# Altium PCB PCB.PcbDoc (part 1 of 2)
Units mil, origin at the board's own origin, x right, y up, seen from the top; angles counter-clockwise.
Board outline 2345 x 4805 mil, 4 copper layers (Top Layer, GND, POWER, Bottom Layer), stack 30.634 mil thick; 165 components, 153 nets, 527 pads, 283 vias.
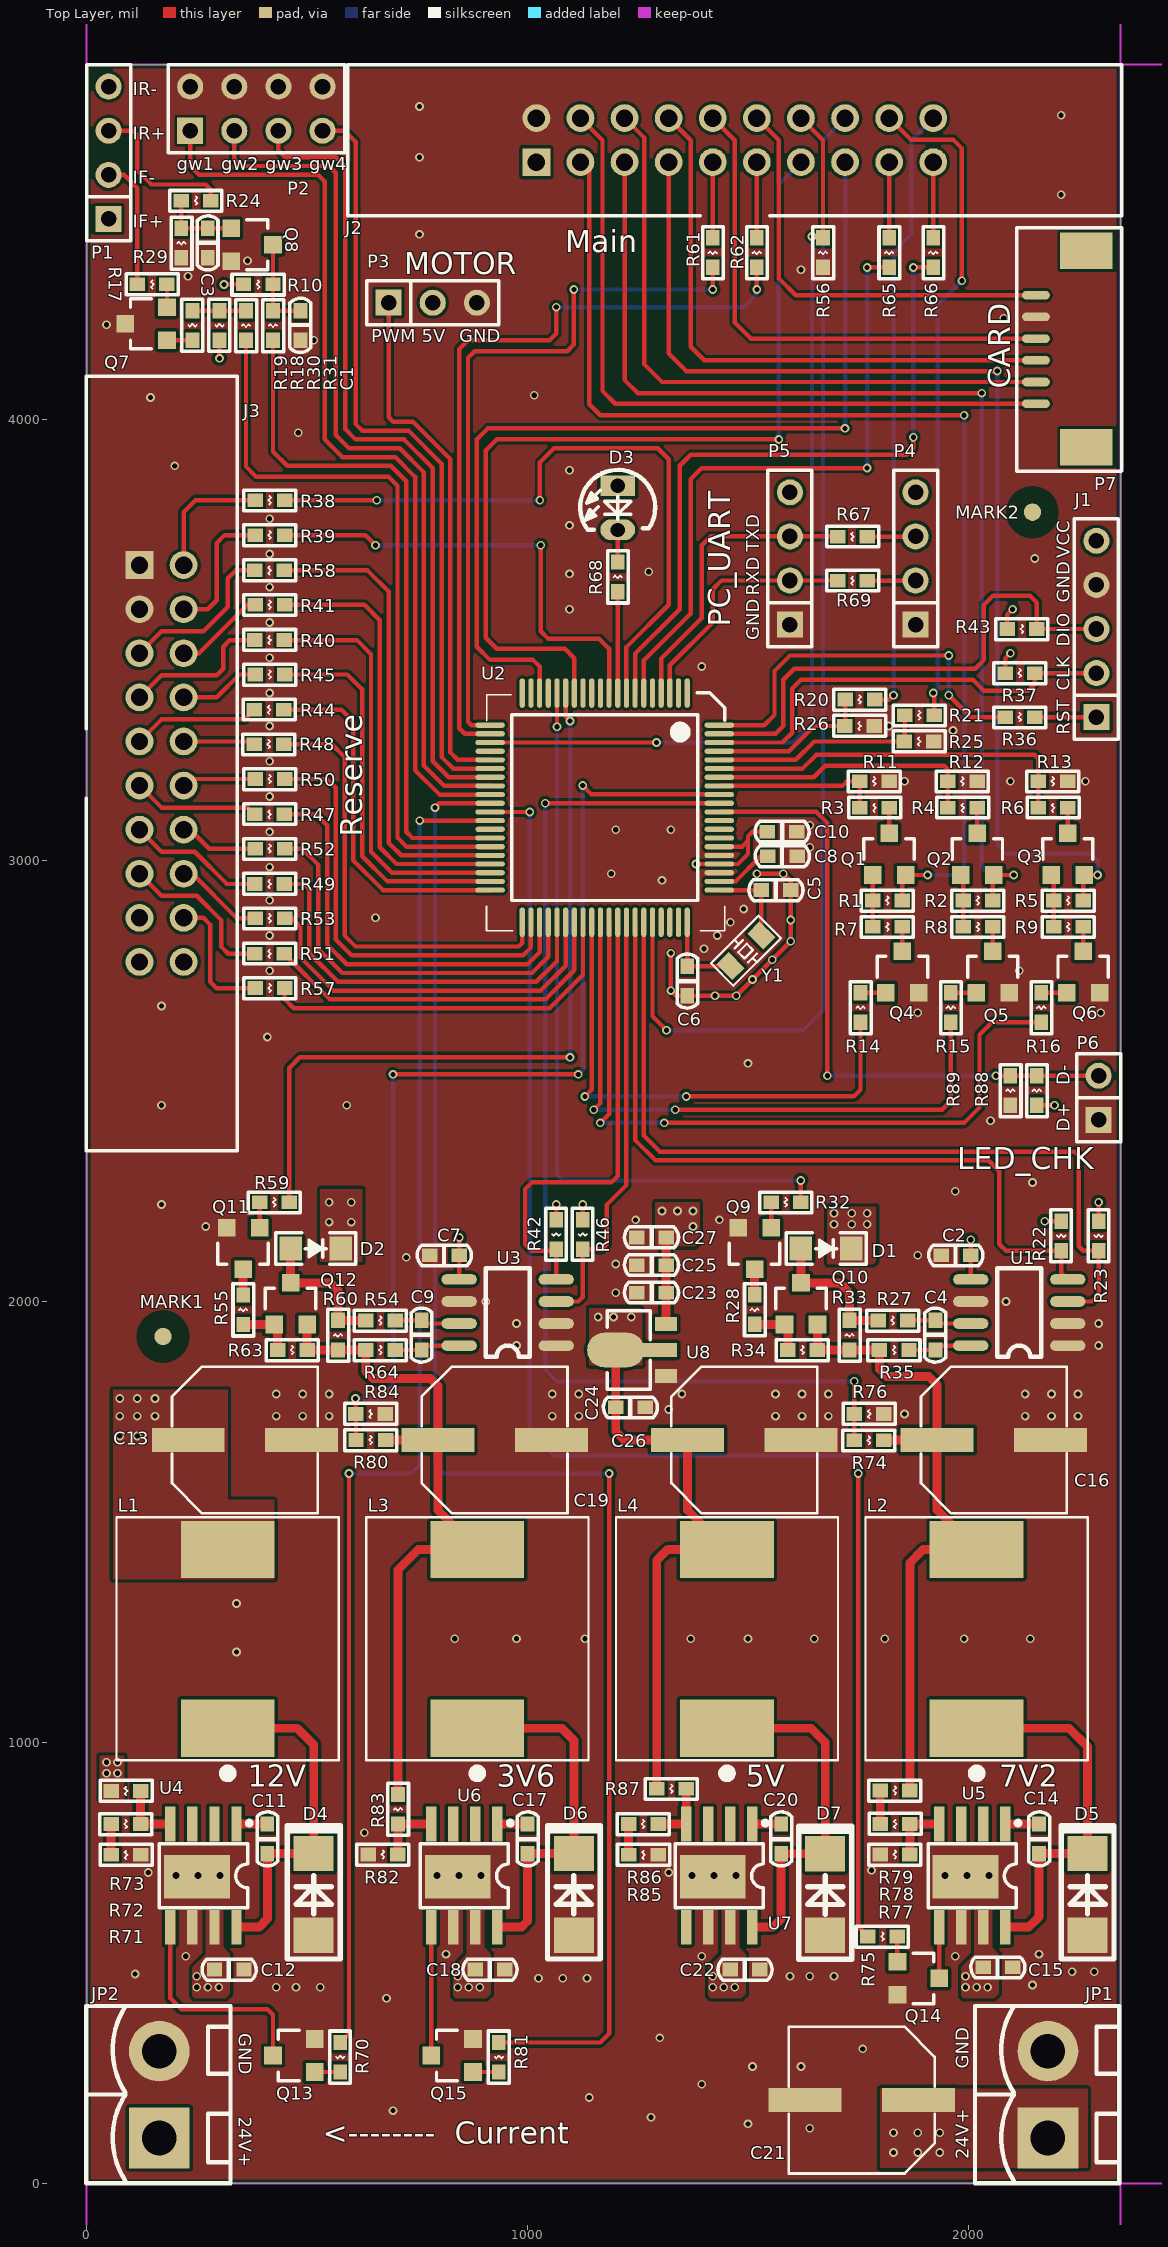
[diagram p0: Top Layer view]
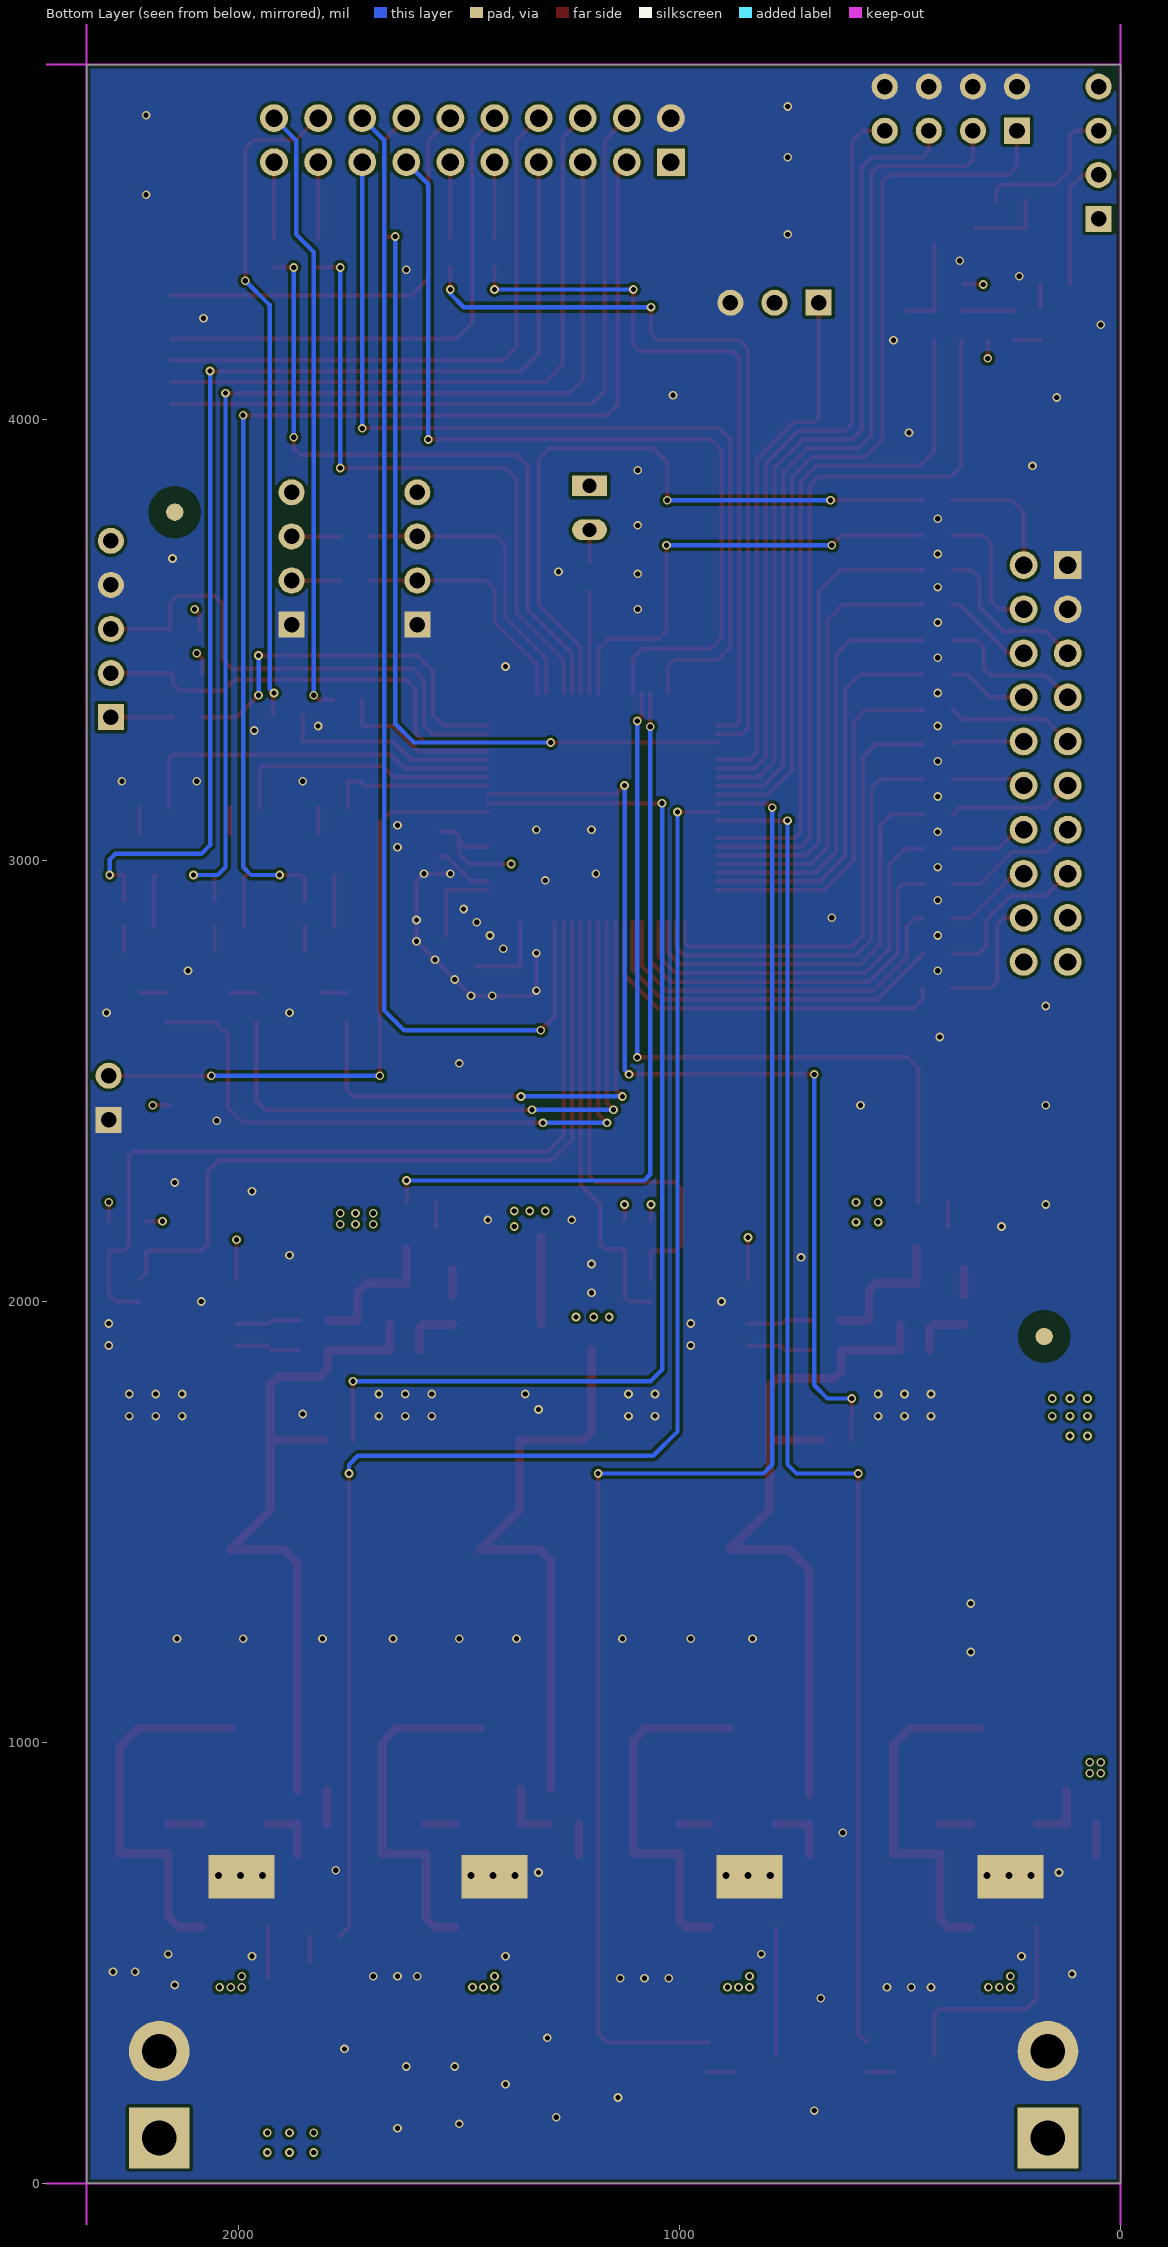
[diagram p1: Bottom Layer view, seen from below]
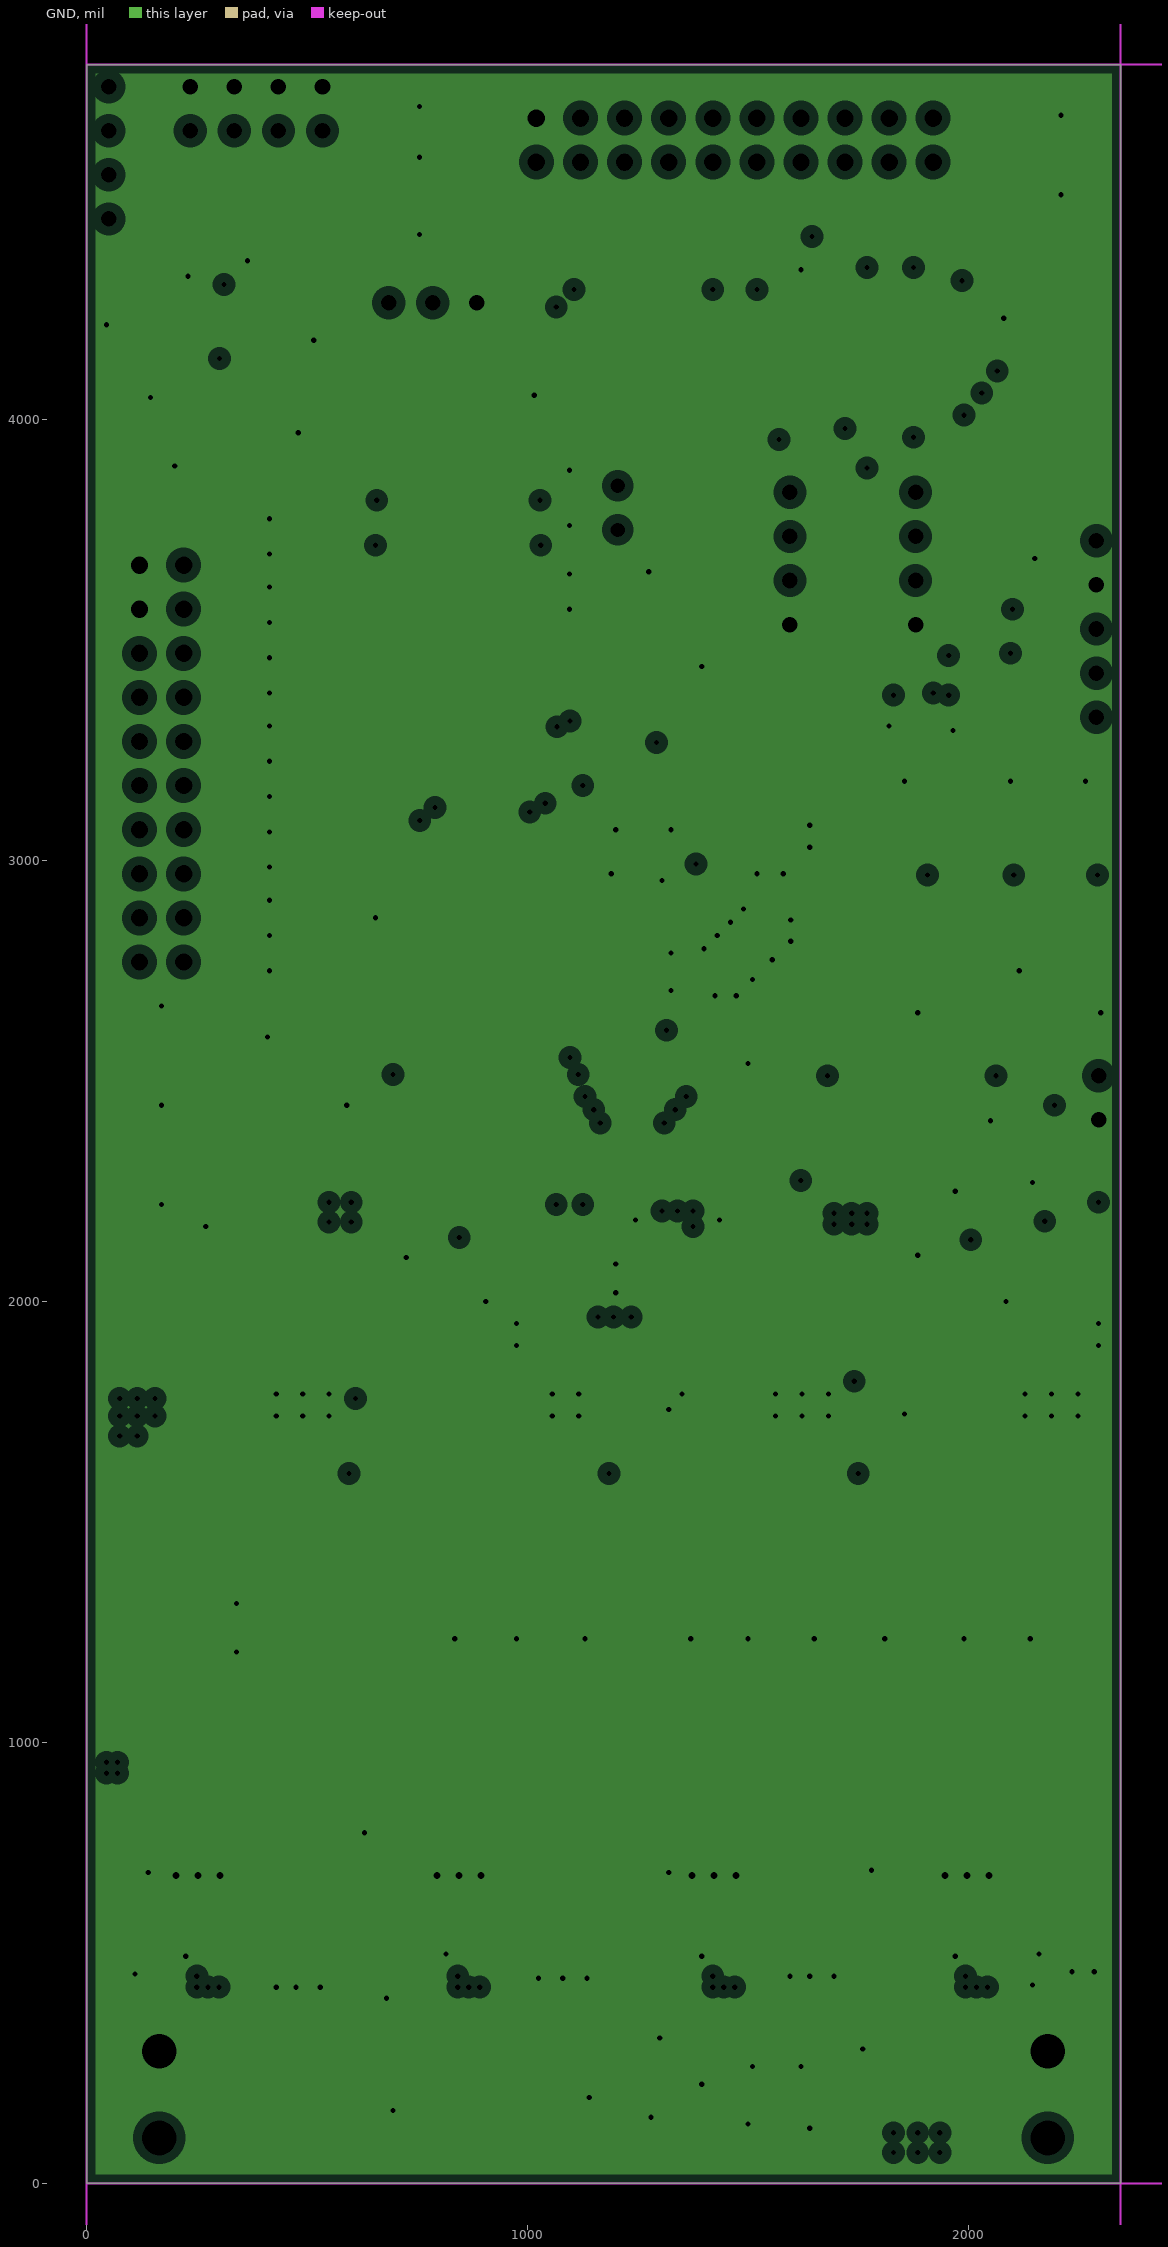
[diagram p2: GND, clearances drawn from the general rule]
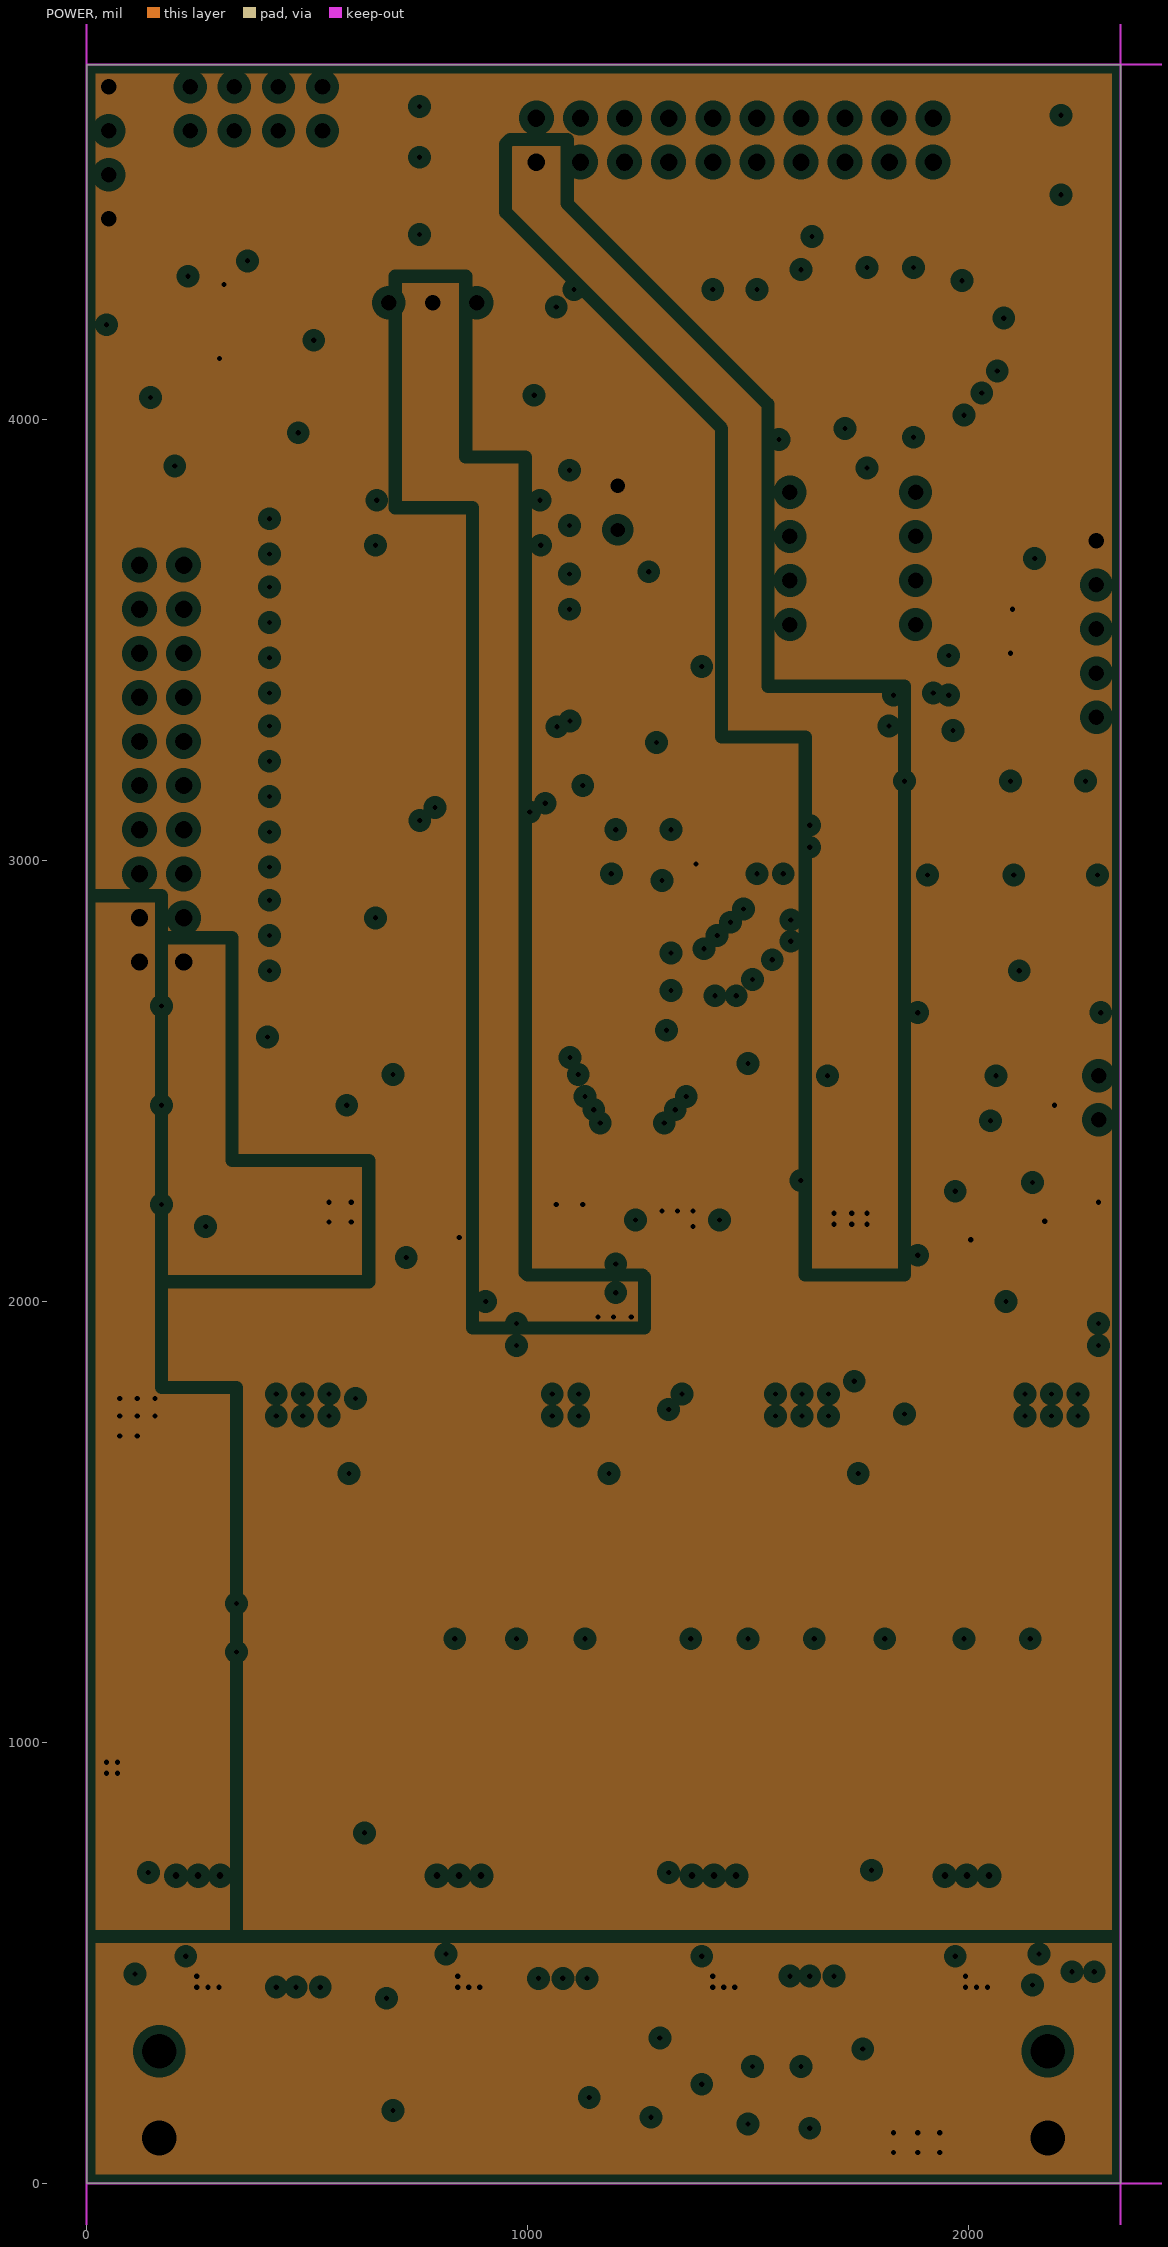
[diagram p3: POWER, clearances drawn from the general rule]

## Layer stack, top to bottom
Top Solder: solder mask 0.4, Solder Resist, Dk 3.5
Top Layer: signal copper 1.4
Dielectric 1: core 10, FR-4, Dk 4.2
GND: plane copper 1.417, net GND
Dielectric 3: prepreg 5, Dk 4.2
POWER: plane copper 1.417, net 3.3V
Dielectric 2: core 10, Dk 4.2
Bottom Layer: signal copper 1.4
Bottom Solder: solder mask 0.4, Solder Resist, Dk 3.5

## Board outline
0,0 2345,0 2345,4805 0,4805

## Design rules (kind name [scope] priority, off if disabled: settings)
Clearance [All] p1: gap=7 ignorepadtopadclearanceinfootprint=FALSE except(0: Arc-Hole Track-Hole SMDPad-Hole THPad-Hole Via-Hole Fill-Hole Poly-Hole Region-Hole Text-Hole)
MinimumSolderMaskSliver [All] p1: minsoldermaskwidth=0
PlaneClearance [All] p1: clearance=20
PlaneConnect [All] p1: planeconnectstyle=Direct reliefexpansion=20 reliefentries=4 reliefconductorwidth=10 reliefairgap=10
PolygonConnect [All] p1: connectstyle=Direct reliefconductorwidth=10 reliefentries=4 polygonreliefangle="90 Angle" airgapwidth=10
RoutingVias [All] p1: holewidth=28 width=50 viastyle="Through Hole" minholewidth=28 minwidth=50 maxholewidth=28 maxwidth=50
SilkToSilkClearance [All] p1: silktosilkclearance=0
SilkToSolderMaskClearance [IsPad] p1: minsilkscreentomaskgap=0 clearancetoexposedcopper=TRUE
SolderMaskExpansion [All] p1: expansion=4
Width [All] p1: maxlimit=30 minlimit=10 preferedwidth=10
25 further rules are at their usual default settings.

## Classes and differential pairs
component class 主控: C1 C2 C3 C4 C5 C6 C7 C8 C9 C10 D1 D2 D3 J1 J2 J3 MARK1 MARK2 P1 P2 P3 P4 P5 P6 P7 Q1 Q2 Q3 Q4 Q5 Q6 Q7 Q8 Q9 Q10 Q11 Q12 R1 R2 R3 R4 R5 R6 R7 R8 R9 R10 R11 R12 R13 R14 R15 R16 R17 R18 R19 R20 R21 R22 R23 R24 R25 R26 R27 R28 R29 R30 R31 R32 R33 R34 R35 R36 R37 R38 R39 R40 R41 R42 R43 R44 R45 R46 R47 R48 R49 R50 R51 R52 R53 R54 R55 R56 R57 R58 R59 R60 R61 R62 R63 R64 R65 R66 R67 R68 R69 R88 R89 U1 U2 U3 Y1
component class 电源: C11 C12 C13 C14 C15 C16 C17 C18 C19 C20 C21 C22 C23 C24 C25 C26 C27 D4 D5 D6 D7 JP1 JP2 L1 L2 L3 L4 Q13 Q14 Q15 R70 R71 R72 R73 R74 R75 R76 R77 R78 R79 R80 R81 R82 R83 R84 R85 R86 R87 U4 U5 U6 U7 U8

## Components (designator, comment, footprint, x,y, rotation, side; value= is the part's Value field where it differs from the comment)
C1 "100pF/50V" CAP0603 485,4246.51 r270 top
C2 "100nF/50V" CAP0603 1938.49,2105 r0 top
C3 "10pF/50V" CAP0603 275,4433.42 r270 top
C4 "100nF/50V" CAP0603 1925,1956.51 r270 top
C5 "12pF/50V" CAP0603 1530.49,2932.99 r0 top
C6 "12pF/50V" CAP0603 1362.01,2693.89 r90 top
C7 "100nF/50V" CAP0603 778.49,2105 r0 top
C8 "100nF/50V" CAP0603 1545,3010 r0 top
C9 "100nF/50V" CAP0603 760,1956.51 r270 top
C10 "100nF/50V" CAP0603 1610,3065 r180 top
C11 "10N/50V" CAP0603 410,748.49 r90 top
C12 "100N/50V" CAP0603 290.49,485 r0 top
C13 "220uF/25V" "220uF 25V" 367.16,1685 r0 top
C14 "10nF/50V" CAP0603 2160,748.49 r90 top
C15 "100nF/50V" CAP0603 2033.82,490 r0 top
C16 "220uF/25V" "220uF 25V" 2065.49,1685 r0 top
C17 "10N/50V" CAP0603 1000,748.49 r90 top
C18 "100N/50V" CAP0603 882.16,485 r0 top
C19 "220uF/25V" "220uF 25V" 933.27,1685 r0 top
C20 "10N/50V" CAP0603 1575,748.49 r90 top
C21 "220uF/25V" "220uF 25V" 1750,190 r180 top
C22 "100N/50V" CAP0603 1460.49,485 r0 top
C23 "10uF/10V" CAP0603 1313.68,2020 r180 top
C24 "100nF/50V" CAP0603 1200.49,1760 r0 top
C25 "100N/50V" CAP0603 1313.68,2082.5 r180 top
C26 "220uF/25V" "220uF 25V" 1499.38,1685 r0 top
C27 "22pF/50V" CAP0603 1313.68,2145 r180 top
D1 "DSK14" SOD-123FL 1617.09,2120 r0 top
D2 "DSK14" SOD-123FL 459.69,2120 r0 top
D3 "LED_T3R" LED2_300 1204.53,3850 r0 top
D4 "B340A-SMA" DO-214AC 515,655.5 r90 top
D5 "B340" DO-214AC 2270,655.5 r90 top
D6 "B340A-SMA" DO-214AC 1105,655.5 r90 top
D7 "B340A-SMA" DO-214AC 1675,655 r90 top
J1 "PIN254_1*5*WXHJ" PIN254_1*5*1100S 2290,3325 r90 top
J2 "20Pin" DC254_2*10 1470,4633.74 r90 top
J3 "20Pin" DC254_2*10 170,3220 r0 top
JP1 "KF129_508_2" KF129_508_2 2180,103.15 r90 top
JP2 "KF129_508_2" KF129_508_2 165,103.15 r90 top
L1 "LQS1260M2200_47uH" LQS1212 320,1235 r90 top
L2 "LQS1260M2200_47uH" LQS1212 2018.33,1235 r90 top
L3 "LQS1260M2200_47uH" LQS1212 886.11,1235 r90 top
L4 "LQS1260M2200_47uH" LQS1212 1452.22,1235 r90 top
MARK1 "MARK" MARK 173.35,1920.62 r90 top
MARK2 "MARK" MARK 2145,3790 r90 top
P1 "PIN254_1*4*WXHJ" PIN254_1*4*1100S 50,4455 r90 top
P2 "Header 4X2" HDR2X4 235,4655 r0 top
P3 "PIN254_1*3*WXHJ" PIN254_1*3*1100S 685,4265 r0 top
P4 "PIN254_1*4*WXHJ" PIN254_1*4*1100S 1880,3535 r90 top
P5 "PIN254_1*4*WXHJ" PIN254_1*4*1100S 1595,3535 r90 top
P6 "PIN254_1*2*WXHJ" PIN254_1*2*1100S 2295,2412 r90 top
P7 "1.25-6AWR" SMT-1.25-6 2210,4160 r90 top
Q1 "PNPS-9012" SOT-23 1820,3014.49 r0 top
Q2 "PNPS-9012" SOT-23 2020,3014.49 r0 top
Q3 "PNPS-9012" SOT-23 2225,3014.49 r0 top
Q4 "NPNS-9013" SOT-23 1850,2747.24 r0 top
Q5 "NPNS-9013" SOT-23 2055,2747.24 r0 top
Q6 "NPNS-9013" SOT-23 2260,2747.24 r0 top
Q7 "PNPS-9012" SOT-23 135,4217.4 r90 top
Q8 "NPNS-9013" SOT-23 375.51,4396.51 r270 top
Q9 "NPNS-9013" SOT-23 1515,2120 r180 top
Q10 "RZR040P01TL" SOT-23 1620,1995 r0 top
Q11 "NPNS-9013" SOT-23 355,2120 r180 top
Q12 "RZR040P01TL" SOT-23 462.6,1995 r0 top
Q13 "NPNS-9013" SOT-23 470,290 r90 top
Q14 "NPNS-9013" SOT-23 1886.09,465 r270 top
Q15 "NPNS-9013" SOT-23 828.91,290 r90 top
R1 "100K 5%" RES0603 1783,2909.49 r0 top
R2 "100K 5%" RES0603 1988,2909.49 r0 top
R3 "100K 5%" RES0603 1820,3119.49 r180 top
R4 "100K 5%" RES0603 2020,3119.49 r180 top
R5 "100K 5%" RES0603 2193,2909.49 r0 top
R6 "100K 5%" RES0603 2225,3119.49 r180 top
R7 "10K 1%" RES0603 1783,2849.49 r0 top
R8 "10K 1%" RES0603 1988,2849.49 r0 top
R9 "10K 1%" RES0603 2193,2849.49 r0 top
R10 "20K 5%" RES0603 355.75,4306.51 r0 top
R11 "10K 5%" RES0603 1753,3179.49 r0 top
R12 "10K 5%" RES0603 1953,3179.49 r0 top
R13 "10K 5%" RES0603 2158,3179.49 r0 top
R14 "1K 5%" RES0603 1755,2633 r90 top
R15 "1K 5%" RES0603 1960,2633 r90 top
R16 "1K 5%" RES0603 2165,2633 r90 top
R17 "100R 5%" RES0603 182.24,4306.51 r180 top
R18 "20K 5%" RES0603 301.25,4247 r270 top
R19 "3K 5%" RES0603 240,4247 r270 top
R20 "100K 5%" RES0603 1720,3365 r0 top
R21 "100K 5%" RES0603 1855,3329.33 r0 top
R22 "10K 5%" RES0603 2210,2182 r270 top
R23 "10K 5%" RES0603 2295,2182 r270 top
R24 "20K 5%" RES0603 215,4496.51 r0 top
R25 "10K 5%" RES0603 1921,3270 r180 top
R26 "10K 5%" RES0603 1786,3305 r180 top
R27 "10R 5%" RES0603 1795,1957 r0 top
R28 "200K 5%" RES0603 1515,1948 r90 top
R29 "47K 5%" RES0603 215,4366.91 r90 top
R30 "0R 5%" RES0603 361.5,4180 r90 top
R31 "0R 5%" RES0603 422.75,4180 r90 top
R32 "1K 5%" RES0603 1552.4,2225 r0 top
R33 "10R 5%" RES0603 1730,1890 r90 top
R34 "2M 5%" RES0603 1590.4,1890 r0 top
R35 "10R 5%" RES0603 1798,1890 r0 top
R36 "100R 5%" RES0603 2083,3325 r0 top
R37 "10K 5%" RES0603 2083,3425 r0 top
R38 "0R 5%" RES0603 382,3817 r0 top
R39 "0R 5%" RES0603 382,3737.98 r0 top
R40 "0R 5%" RES0603 448,3499.93 r180 top
R41 "0R 5%" RES0603 382,3579.94 r0 top
R42 "10K 5%" RES0603 1065,2185 r270 top
R43 "10K 5%" RES0603 2088,3525 r0 top
R44 "0R 5%" RES0603 447,3341.89 r180 top
R45 "0R 5%" RES0603 382,3421.91 r0 top
R46 "10K 5%" RES0603 1125,2185 r270 top
R47 "0R 5%" RES0603 448,3104.84 r180 top
R48 "0R 5%" RES0603 380,3263.87 r0 top
R49 "0R 5%" RES0603 448,2946.8 r180 top
R50 "0R 5%" RES0603 382,3184.85 r0 top
R51 "0R 5%" RES0603 448,2788.76 r180 top
R52 "0R 5%" RES0603 382,3026.82 r0 top
R53 "0R 5%" RES0603 382,2868.78 r0 top
R54 "10R 5%" RES0603 633,1957 r0 top
R55 "200K 5%" RES0603 355,1947.76 r90 top
R56 "10K 5%" RES0603 1670,4345 r90 top
R57 "0R 5%" RES0603 382,2710.75 r0 top
R58 "0R 5%" RES0603 448,3657.96 r180 top
R59 "1K 5%" RES0603 392.4,2225 r0 top
R60 "10R 5%" RES0603 570,1890 r90 top
R61 "0R 5%" RES0603 1420,4345 r90 top
R62 "0R 5%" RES0603 1520,4345 r90 top
R63 "2M 5%" RES0603 433,1890 r0 top
R64 "10R 5%" RES0603 633,1890 r0 top
R65 "0R 5%" RES0603 1820,4345 r90 top
R66 "0R 5%" RES0603 1920,4345 r90 top
R67 "22R 5%" RES0603 1770,3734.5 r180 top
R68 "1K 5%" RES0603 1204.53,3610 r90 top
R69 "22R 5%" RES0603 1770,3634.5 r180 top
R70 "1K 5%" RES0603 575,319.6 r270 top
R71 "1K 5%" RES0603 122.49,745 r180 top
R72 "10K 5%" RES0603 55.49,815 r0 top
R73 "100K 5%" RES0603 122.49,890 r180 top
R74 "100K 5%" RES0603 1741,1685 r0 top
R75 "1K 5%" RES0603 1771.84,560 r0 top
R76 "10K 5%" RES0603 1808,1745 r180 top
R77 "5.1K 5%" RES0603 1800,746 r0 top
R78 "25K 1%" RES0603 1867,815 r180 top
R79 "1.5K 5%" RES0603 1800,891 r0 top
R80 "100K 5%" RES0603 611,1686 r0 top
R81 "1K 5%" RES0603 935,319.6 r270 top
R82 "4.7K 5%" RES0603 639,746 r0 top
R83 "10K 5%" RES0603 706,815 r90 top
R84 "10K 5%" RES0603 677,1745 r180 top
R85 "20K 5%" RES0603 1296,745 r180 top
R86 "10K 5%" RES0603 1229,815 r0 top
R87 "100K 5%" RES0603 1293,895 r0 top
R88 "100K 5%" RES0603 2155,2445 r90 top
R89 "10K 5%" RES0603 2095,2445 r90 top
U1 "INA219" SO-8 2225,1900 r180 top
U2 "FM33LG048" LQFP80 1175,3120 r270 top
U3 "INA219" SO-8 1065,1900 r180 top
U4 "TPS5430DDA" SOP-8-P 340,815 r270 top
U5 "TPS5430DDA" SOP-8-P 2083.33,815 r270 top
U6 "TPS5430DDA" SOP-8-P 931.67,815 r270 top
U7 "TPS5430DDA" SOP-8-P 1510,815 r270 top
U8 "CE6232A33P" SOT-89 1278.74,1890 r90 top
Y1 "32.768kD" SMD-3215_2P 1530,2830 r225 top

## Footprints (in the part's own frame and the unit in brackets; to place one, negate y for a bottom-side part, rotate by r counter-clockwise, add the part's x,y. Pads: shape width x height; smd on the part's side, far side on the other; paste and mask are expansions set on the pad)
"220uF 25V" [mm]
  rect 4.2x1.4 smd: 1(-3.47,0.025) 2(3.064,0.025)
  silkscreen extent -4.4,-4.2 4,4.25
CAP0603 [mil]
  rect 35x31 smd: 1(-0.49,0) 2(66.51,0)
  silkscreen extent -29,-24 94,23, body extent 1,-15 72,15, height 20
DC254_2*10 [mm]
  rect 1.6x1.6 hole 1: 1(-1.27,11.43)
  round 1.6 hole 1: 2(1.27,11.43) 3(-1.27,8.89) 4(1.27,8.89) 5(-1.27,6.35) 6(1.27,6.35) 7(-1.27,3.81) 8(1.27,3.81) 9(-1.27,1.27) 10(1.27,1.27) 11(-1.27,-1.27) 12(1.27,-1.27) 13(-1.27,-3.81) 14(1.27,-3.81) 15(-1.27,-6.35) 16(1.27,-6.35) 17(-1.27,-8.89) 18(1.27,-8.89) 19(-1.27,-11.43) 20(1.27,-11.43)
  silkscreen extent -4.35,-22.3 4.35,22.3
DO-214AC [mil]
  rect 80x90.55 smd: 1(-92.5,0) 2(92.5,0)
  silkscreen extent -146,-60 156,60, body extent -91,-53 90,53, height 94
HDR2X4 [mm] "Connector; Header; 4x2 Position"
  rect 1.5x1.5 hole 0.9: 1(0,0)
  round 1.5 hole 0.9: 2(0,2.54) 3(2.54,0) 4(2.54,2.54) 5(5.08,0) 6(5.08,2.54) 7(7.62,0) 8(7.62,2.54)
  silkscreen extent -1.27,-1.27 8.89,3.81
KF129_508_2 [mm]
  rect 3.5x3.5 hole 2: 1(0,0)
  round 3.5 hole 2: 2(5,0)
  silkscreen extent -2.6,-4.1 7.6,4.2
LED2_300 [mm]
  rect 2x1.2 hole 0.813: 1(0,0)
  oval 2x1.2 hole 0.813: 2(0,-2.54)
  silkscreen extent -2.16,-2.53 2.16,0.91, body extent -1.65,-2.91 1.64,0.39, height 5.51
LQFP80 [mm]
  oval 1.7x0.3 smd: 1(-6.6,4.75) 2(-6.6,4.25) 3(-6.6,3.75) 4(-6.6,3.25) 5(-6.6,2.75) 6(-6.6,2.25) 7(-6.6,1.75) 8(-6.6,1.25) 9(-6.6,0.75) 10(-6.6,0.25) 11(-6.6,-0.25) 12(-6.6,-0.75) 13(-6.6,-1.25) 14(-6.6,-1.75) 15(-6.6,-2.25) 16(-6.6,-2.75) 17(-6.6,-3.25) 18(-6.6,-3.75) 19(-6.6,-4.25) 20(-6.6,-4.75) 41(6.6,-4.75) 42(6.6,-4.25) 43(6.6,-3.75) 44(6.6,-3.25) 45(6.6,-2.75) 46(6.6,-2.25) 47(6.6,-1.75) 48(6.6,-1.25) 49(6.6,-0.75) 50(6.6,-0.25) 51(6.6,0.25) 52(6.6,0.75) 53(6.6,1.25) 54(6.6,1.75) 55(6.6,2.25) 56(6.6,2.75) 57(6.6,3.25) 58(6.6,3.75) 59(6.6,4.25) 60(6.6,4.75)
  oval 0.3x1.7 smd: 21(-4.75,-6.6) 22(-4.25,-6.6) 23(-3.75,-6.6) 24(-3.25,-6.6) 25(-2.75,-6.6) 26(-2.25,-6.6) 27(-1.75,-6.6) 28(-1.25,-6.6) 29(-0.75,-6.6) 30(-0.25,-6.6) 31(0.25,-6.6) 32(0.75,-6.6) 33(1.25,-6.6) 34(1.75,-6.6) 35(2.25,-6.6) 36(2.75,-6.6) 37(3.25,-6.6) 38(3.75,-6.6) 39(4.25,-6.6) 40(4.75,-6.6) 61(4.75,6.6) 62(4.25,6.6) 63(3.75,6.6) 64(3.25,6.6) 65(2.75,6.6) 66(2.25,6.6) 67(1.75,6.6) 68(1.25,6.6) 69(0.75,6.6) 70(0.25,6.6) 71(-0.25,6.6) 72(-0.75,6.6) 73(-1.25,6.6) 74(-1.75,6.6) 75(-2.25,6.6) 76(-2.75,6.6) 77(-3.25,6.6) 78(-3.75,6.6) 79(-4.25,6.6) 80(-4.75,6.6)
  silkscreen extent -6.62,-6.81 7.1,6.91, body extent -5.33,-5.33 5.36,5.33, height 2
LQS1212 [mm]
  rect 3.3x5.4 smd: 1(-5.15,0) 2(5.15,0)
  silkscreen extent -8,-6.4 7,6.4, body extent -6.35,-6.1 6.35,6.1, height 6
MARK [mm]
  round 1 smd: 0(0,0)
  round 1 smd far side: 1(0,0)
  Top Layer pour cut-out: -1.5,0 -1.5,-0.148 -1.442,-0.438 -1.329,-0.711 -1.165,-0.956 -0.956,-1.165 -0.711,-1.329 -0.438,-1.442 -0.148,-1.5 0,-1.5 0.148,-1.5 0.438,-1.442 0.711,-1.329 0.956,-1.165 1.165,-0.956 1.329,-0.711 1.442,-0.438 1.5,-0.148 1.5,0 1.5,0.148 1.442,0.438 1.329,0.711 1.165,0.956 0.956,1.165 0.711,1.329 0.438,1.442 0.148,1.5 0,1.5 -0.148,1.5 -0.438,1.442 -0.711,1.329 -0.956,1.165 -1.165,0.956 -1.329,0.711 -1.442,0.438 -1.5,0.148 -1.5,0
  Bottom Layer pour cut-out: -1.5,0 -1.5,-0.148 -1.442,-0.438 -1.329,-0.711 -1.165,-0.956 -0.956,-1.165 -0.711,-1.329 -0.438,-1.442 -0.148,-1.5 0,-1.5 0.148,-1.5 0.438,-1.442 0.711,-1.329 0.956,-1.165 1.165,-0.956 1.329,-0.711 1.442,-0.438 1.5,-0.148 1.5,0 1.5,0.148 1.442,0.438 1.329,0.711 1.165,0.956 0.956,1.165 0.711,1.329 0.438,1.442 0.148,1.5 0,1.5 -0.148,1.5 -0.438,1.442 -0.711,1.329 -0.956,1.165 -1.165,0.956 -1.329,0.711 -1.442,0.438 -1.5,0.148 -1.5,0
PIN254_1*2*1100S [mm] "Connector; Header; 4 Position"
  rect 1.5x1.5 hole 0.9: 1(0,0)
  round 1.5 hole 0.9: 2(2.54,0)
  silkscreen extent -1.27,-1.27 3.81,1.27
PIN254_1*3*1100S [mm] "Connector; Header; 4 Position"
  rect 1.5x1.5 hole 0.9: 1(0,0)
  round 1.5 hole 0.9: 2(2.54,0) 3(5.08,0)
  silkscreen extent -1.27,-1.27 6.35,1.27
PIN254_1*4*1100S [mm] "Connector; Header; 4 Position"
  rect 1.5x1.5 hole 0.9: 1(0,0)
  round 1.5 hole 0.9: 2(2.54,0) 3(5.08,0) 4(7.62,0)
  silkscreen extent -1.27,-1.27 8.89,1.27, body extent -1.3,-1.3 8.86,1.24, height 8.54
PIN254_1*5*1100S [mm]
  rect 1.5x1.5 hole 0.9: 1(0,0)
  round 1.5 hole 0.9: 2(2.54,0) 3(5.08,0) 4(7.62,0) 5(10.16,0)
  silkscreen extent -1.27,-1.27 11.43,1.27
RES0603 [mil]
  rect 35x31 smd: 1(0,0) 2(67,0)
  silkscreen extent -26,-24 92,23, body extent 0,-15 71,15, height 12
SMD-3215_2P [mm]
  rect 1x1.3 smd: 1(0,0) 2(2.5,0)
  silkscreen extent -0.69,-0.91 3.19,0.91, body extent -0.3,-0.99 2.9,0.99, height 0.7
SMT-1.25-6 [mm]
  oval 0.5x1.6 smd: 1(-3.15,1.45) 2(-1.9,1.45) 3(-0.65,1.45) 4(0.6,1.45) 5(1.85,1.45) 6(3.1,1.45)
  rect 2.1x3 smd: 7(-5.65,-1.45) 8(5.65,-1.45)
  silkscreen extent -7.05,-3.5 7,2.55
SO-8 [mil]
  oval 80x24 smd: 1(0,0) 2(0,-50) 3(0,-100) 4(0,-150) 5(220,-150) 6(220,-100) 7(220,-50) 8(220,0)
  silkscreen extent 60,-175 160,25, body extent -7,-171 229,21, height 67
SOD-123FL [mm]
  rect 1.3x1.4 smd: 1(0.074,0) 2(2.974,0)
  silkscreen extent -0.78,-0.9 3.82,0.9, body extent -0.28,-0.82 3.32,0.82, height 0.95
SOP-8-P [mm]
  rect 2x0.6 smd: 1(0,0) 2(0,-1.27) 3(0,-2.54) 4(0,-3.81) 5(5.94,-3.81) 6(5.94,-2.54) 7(5.94,-1.27) 8(5.94,0)
  rect 2.5x3.8 smd: 9(3.048,-2.286)
  rect 2.5x3.8 smd far side: 9(3.048,-2.286)
  silkscreen extent -0.18,-4.44 4.83,0.86, body extent 0.38,-4.57 5.72,0.76, height 1.8
SOT-23 [mil]
  rect 40x40 smd: 1(-37.4,-47.24) 2(37.4,-47.24) 3(0,47.24)
  silkscreen extent -57,-12 57,35, body extent -57,-55 57,55, height 47
SOT-89 [mm]
  rect 0.8x1.27 smd: 1(-1.5,-0.9) 3(1.5,-0.9)
  oval 2x3.3 smd: 2(0,2)
  rect 0.8x2.54 smd: 2(0,-0.265)
  silkscreen extent -2.25,0 2.25,2.5, body extent -2.25,-1.02 2.25,2.92, height 1.4

## Part data
C1: library part 101020103-0010, "101pf,50 V,±5%,0603,国巨,CC0603JRNP09BN101", Part Name=0603贴片电容, ID=4, Part Number=101020103-0010, SMD/DIP=SMD
C2 C4 C7 C8 C9 C10 C15 C24: library part 101020103-0021, "104pF,50 V,±10%,0603,国巨,CC0603KRX7R9BB104", Part Name=0603贴片电容, ID=3, Part Number=101020103-0021, SMD/DIP=SMD
C3: library part 101020103-0014, "10pF,50 V,±5%,0603,X7R,国巨,CC0603JRNPO9BN100", Part Name=0603贴片电容, ID=7, Part Number=101020103-0014, SMD/DIP=SMD
C5 C6: library part 101020103-0005, "12P,50 V,±5%,0603,国巨,CC0603JRNPO9BN12", Part Name=0603贴片电容, ID=11, Part Number=101020103-0005, SMD/DIP=SMD
C11 C17 C20: library part 101020103-0007, "10N/50V，±10%，0603", Part Name=0603贴片电容, ID=35, Part Number=101020103-0007
C12 C18 C22 C25: library part 101020103-0021, "100N/50V，±10%，0603", Part Name=0603贴片电容, ID=34, Part Number=101020103-0021
C13 C16 C19 C21 C26: "220UF,25 V,±20%,8*10mm,立隆电子工业股份有限公司,VEJ221M1ETR-0810", 料号=1010203-0037
C14: library part 101020103-0007, "10nF,50 V,±10%,0603,X7R,国巨,CC0603KRX7R9BB103", Part Name=0603贴片电容, ID=6, Part Number=101020103-0007, SMD/DIP=SMD
C23: library part 101020103-0026, "106pF,10 V,±10%,0603,村田,GRM188R61A106KE47D", Part Name=0603贴片电容, ID=8, Part Number=101020103-0026, SMD/DIP=SMD
C27: library part 101020103-0009, "22pF,50 V,±5%,0603,国巨,CC0603JRNPO9BN22", Part Name=0603贴片电容, ID=16, Part Number=101020103-0009, SMD/DIP=SMD
D1 D2: library part 101040101-0043, "DSK14,SOD-123FL,1 A,40 V,28 V,台湾强茂集团苏州群鑫电子,DSK14", Part Name=二极管, ID=10, Part Number=101040101-0043, SMD/DIP=SMD
D3: library part 101040102-0001, "圆形插件,3mm 圆形,插件,红光,湖北匡通电子有限公司,3BB4HC", Part Name=发光二极管, ID=6, Part Number=101040102-0001, SMD/DIP=DIP
D4 D6 D7: library part 101040101-0014, Part Name=贴片肖特基, ID=24, Part Number=101040101-0014
D5: library part 101040101-0014, "B340,SMA,3 A,0.7 V,28 V,DIODES,B340A-13-F", Part Name=贴片肖特基, ID=7, Part Number=101040101-0014, SMD/DIP=SMD
J1: library part AD_WXHJ_PinHeader_02, "1*5 ，Φ1.0 ，2.54mm，直脚,无需焊接器件", Part Name=排针, ID=17, Part Number=AD_WXHJ_PinHeader_02, SMD/DIP=DIP
J2 J3: library part 1010902-0139, "DC2 2.54mm 2x10pin,2.54mm间距，2x10pin，32×8.55×27.5mm,母头,双排,双排牛角座", Part Name=DC牛角座, ID=4, Part Number=1010902-0139, SMD/DIP=DIP
JP1 JP2: library part 1010904-0015, "KF129-2P,螺丝紧固,2,ABS,松涛", Part Name=接线端子, ID=7, Part Number=1010904-0015, SMD/DIP=DIP
L1 L2 L3 L4: library part 1010302-0007, "47uH/2.2A,±20%，0.072Ω，L1200X1200X600", Part Name=贴片电感, ID=3, Part Number=1010302-0007
MARK1 MARK2: "MARK点", Part Number=AD_WXHJ_MARK_01, ID=8, Part Name=MARK点, SMD/DIP=SMD
P1 P4 P5: library part AD_WXHJ_PinHeader_01, "1*4 ，Φ1.0 ，2.54mm，直脚,无需焊接器件", Part Name=排针, ID=16, Part Number=AD_WXHJ_PinHeader_01, SMD/DIP=DIP
P2: "Header, 4-Pin, Dual row"
P3: library part AD_WXHJ_PinHeader_01, "1*3 ，Φ1.0 ，2.54mm，直脚,无需焊接器件", Part Name=排针, ID=16, Part Number=AD_WXHJ_PinHeader_01, SMD/DIP=DIP
P6: library part AD_WXHJ_PinHeader_01, "1*2 ，Φ1.0 ，2.54mm，直脚,无需焊接器件", Part Name=排针, ID=16, Part Number=AD_WXHJ_PinHeader_01, SMD/DIP=DIP
P7: library part 1010902-0121, "1.25-6AWR 卷,6针1.25mm,母头,单排,贴片卧式", Part Name=插座, ID=32, Part Number=1010902-0121, SMD/DIP=SMD
Q1 Q2 Q3 Q7: library part 101040201-0001, "9012,PNP,SOT-23,JCET;长电,S9012", Part Name=贴片三极管, ID=17, Part Number=101040201-0001, SMD/DIP=SMD
Q4 Q5 Q6 Q8 Q9 Q11 Q13 Q14 Q15: library part 101040201-0002, "9013,NPN,SOT-23,长电,S9013", Part Name=贴片三极管, ID=15, Part Number=101040201-0002, SMD/DIP=SMD
Q10 Q12: library part 101040201-0010, "RZR040P01TL；1.5v导通,P-MOS,SOT-23,罗姆,RZR040P01TL", Part Name=PMOS管, ID=18, Part Number=101040201-0010, SMD/DIP=SMD
R1 R2 R3 R4 R5 R6 R73 R74 R88: library part 101010103-0005, "国巨,±5%,0603,,155 ℃,-55 ℃,RC0603JR-07100KL,无铅,100 ppm/℃,1/10W,,100K", Part Name=0603贴片电阻, ID=3, Part Number=101010103-0005, SMD/DIP=SMD
R7 R8 R9: library part 101010103-0052, "10K±1%,1/10W,0603", Part Name=0603贴片电阻, ID=6, Part Number=101010103-0052, SMD/DIP=SMD
R10 R18 R24 R85: library part 101010103-0004, "国巨,±5%,0603,,155 ℃,-55 ℃,RC0603JR-0720KL,无铅,200 ppm/℃,1/10W,,20K", Part Name=0603贴片电阻, ID=15, Part Number=101010103-0004, SMD/DIP=SMD
R11 R12 R13 R22 R23 R25 R26 R37 R42 R43 R46 R56 R72 R76 R83 R84 R86 R89: library part 101010103-0003, "国巨,±5%,0603,,155 ℃,-55 ℃,RC0603JR-0710KL,无铅,200 ppm/℃,1/10W,,10K", Part Name=0603贴片电阻, ID=7, Part Number=101010103-0003, SMD/DIP=SMD
R14 R15 R16 R32 R59 R68 R70 R71 R75 R81: library part 101010103-0008, "1K,±5%,1/10W,0603,国巨,RC0603JR-071KL", Part Name=0603贴片电阻, Part Number=101010103-0008, SMD/DIP=SMD
  R14 R15 R16 R32 R59 R70 R71 R75 R81: ID=10
  R68: ID=9
R17 R36: library part 101010103-0022, "100R,±5%,1/10W,0603,国巨,RC0603JR-07100RL", Part Name=0603贴片电阻, ID=5, Part Number=101010103-0022, SMD/DIP=SMD
R19: library part 101010103-0006, "国巨,±5%,0603,,155 ℃,-55 ℃,RC0603JR-073KL,无铅,100 ppm/℃,1/10W,,3K", Part Name=0603贴片电阻, ID=23, Part Number=101010103-0006, SMD/DIP=SMD
R20 R21 R80 R87: library part 101010103-0005, "100K±5%,1/10W,0603", Part Name=0603贴片电阻, ID=30, Part Number=101010103-0005
R27 R33 R35 R54 R60 R64: library part 101010103-0017, "10R,±5%,1/10W,0603,国巨,RC0603JR-0710RL", Part Name=0603贴片电阻, ID=8, Part Number=101010103-0017, SMD/DIP=SMD
R28 R55: library part 101010103-0034, "200K,±5%,1/10W,0603,国巨,RC0603JR-07200KL", Part Name=0603贴片电阻, ID=13, Part Number=101010103-0034, SMD/DIP=SMD
R29: library part 101010103-0012, "47K,±5%,1/10W,0603,国巨,RC0603JR-0747KL", Part Name=0603贴片电阻, ID=26, Part Number=101010103-0012, SMD/DIP=SMD
R30 R31 R38 R39 R40 R41 R44 R45 R47 R48 R49 R50 R51 R52 R53 R57 R58 R61 R62 R65 R66: library part 101010103-0001, "国巨,±5%,0603,,155 ℃,-55 ℃,RC0603J2-070RL,无铅,200 ppm/℃,1/10W,,0R", Part Name=0603贴片电阻, ID=1, Part Number=101010103-0001, SMD/DIP=SMD
R34 R63: library part 101010103-0025, "国巨,±5%,0603,,155 ℃,-55 ℃,RC0603JR-072ML,含铅,100 ppm/℃,1/10W,,2M", Part Name=0603贴片电阻, ID=20, Part Number=101010103-0025, SMD/DIP=SMD
R67 R69: library part 101010103-0009, "国巨,±5%,0603,,155 ℃,-55 ℃,RC0603JR-0722RL,无铅,200 ppm/℃,1/10W,,22欧", Part Name=0603贴片电阻, ID=18, Part Number=101010103-0009, SMD/DIP=SMD
R77: library part 101010103-0015, "国巨,±5%,0603,,155 ℃,55 ℃,RC0603JR-075.1KL,无铅,200 ppm/℃,1/10W,,5.1k", Part Name=0603贴片电阻, ID=27, Part Number=101010103-0015, SMD/DIP=SMD
R78: library part 101010103-056, "25K±1%,1/10W,0603", Part Name=0603贴片电阻, Part Number=101010103-0056, ID=10, SMD/DIP=SMD
R79: library part 101010103-0013, "1.5K,±5%,1/10W,0603,国巨,RC0603JR-071K5L", Part Name=0603贴片电阻, ID=10, Part Number=101010103-0013, SMD/DIP=SMD
R82: library part 101010103-0042, "4.7K±5%,1/10W,0603", Part Name=0603贴片电阻, ID=24, Part Number=101010103-0042, SMD/DIP=SMD
U2: "101050101-0261"
U4 U5 U6 U7: library part 101050101-0053, "TPS5430DDA,SOP8,TI,TPS5430DDA", Part Name=电源芯片, ID=9, Part Number=101050101-0053, SMD/DIP=SMD
U8: library part 1010503-0029, "CE6232-3.3,CE6232-3.3,SOT89-3,8V,1.8V,0.11V,3.3V,300mA,0.8uA,南京芯力微电子有限公司", Part Name=线性稳压芯片, ID=5, Part Number=1010503-0029, SMD/DIP=SMD
Y1: library part 1010601-0009, Part Name=贴片晶振, Part Number=1010601-0020, ID=20, SMD/DIP=SMD

## Via types
v1: diameter 19.68, hole 11.81, Top Layer to Bottom Layer, tented both sides, 271 vias
v2: diameter 32, hole 16, Top Layer to Bottom Layer, 12 vias

## Nets (pads, with @x,y where several pads share a name; then routed paths per layer and width w, separated by ;. In a path a pad name is that pad's centre, name@x,y a point inside that pad or via, vN(x,y) a via of type N, cw(c..) or ccw(c..) an arc to the next point about the centre after c; other vN are vias at no path point)
3.3V: C2.2 C7.2 C10.2 C23.1 C25.1 C27.1 D3.1 J1.5 P1.1 P1.4 R10.1 R18.2 R22.1 R23.1 R37.1 R42.1 R43.1 R46.1 R88.1 U1.5 U2.64 U2.66 U3.5 U8.3 | length 1042.3
  Top Layer w10: v1(301.25,4138.75) R18.2@301.25,4180 ; v1(311.51,4306.51) R10.1@355.75,4306.51 ; U3.5@845,2050 C7.2@845,2105 v1(845,2145) ; R42.1@1065,2185 v1(1065,2220) ; R46.1@1125,2185 v1(1125,2220) ; v1(1382.05,2992.05) U2.64@1434.84,2992.05 1477.05,2992.05 1500,3015 1500,3045 ; U2.66@1434.84,3031.42 1486.42,3031.42 1500,3045 ; C10.2@1543.49,3065 1510,3065 1500,3055 1500,3045 ; U1.5@2005,2050 C2.2@2005,2105 v1(2005,2140) ; R37.1@2083,3425 2083,3458 v1(2095,3470) ; R43.1@2088,3525 2088,3558 v1(2100,3570) ; R88.1@2155,2445 v1(2195,2445) ; v1(2173,2182) R22.1@2210,2182 ; R23.1@2295,2182 v1(2295,2225)
  Top Layer w20: U8.3@1314.17,1949.06 C23.1@1314.17,2020 C25.1@1314.17,2082.5 C27.1@1314.17,2145
  other v1: 1375,2170 1305,2205 1340,2205 1375,2205
3.6V_I_CHK_CTL: R59.2 U2.15 | length 1781.8
  Top Layer w10: R59.2@459.4,2225 459.4,2529.4 483.58,2553.58 v1(1096.42,2553.58) ; U2.15@1086.42,3379.84 1086.42,3326.42 v1(1096.42,3316.42)
  Bottom Layer w10: v1(1096.42,2553.58) v1(1096.42,3316.42)
7.2V_I_CHK_CTL: R32.2 U2.16 | length 1699.4
  Top Layer w10: v1(1066.73,3303.27) U2.16@1066.73,3379.84 ; R32.2@1619.4,2225 v1(1619.4,2274.4)
  Bottom Layer w10: v1(1066.73,3303.27) 1066.73,2288.27 1080.6,2274.4 v1(1619.4,2274.4)
12V: C13.1 J3.17 J3.19 L1.2 R73.2
  other v1: 45,930 70,930 45,955 70,955 75,1695 115,1695 75,1740 115,1740 155,1740 75,1780 115,1780 155,1780
12V_CTL: R70.1 U2.32 | length 3087.3
  Top Layer w10: R70.1@575,319.6 595,339.6 v1(595,1610) ; v1(755.47,3090.47) U2.32@915.16,3090.47
  Bottom Layer w10: v1(595,1610) 735,1610 755.47,1630.47 v1(755.47,3090.47)
119: R41.2 U2.37 | length 1011.4
  Top Layer w10: R41.2@449,3579.94 630.06,3579.94 665,3545 665,3030 702.95,2992.05 U2.37@915.16,2992.05
AD1: J2.3 Q1.2 R1.2 | length 2643.2
  Top Layer w10: J2.3@1120,4583.74 1140,4563.74 1140,4035 1165,4010 v1(1990,4010) ; R1.2@1850,2909.49 1850,2959.84 Q1.2@1857.4,2967.24 v1(1907.24,2967.24)
  Bottom Layer w10: v1(1907.24,2967.24) 1972.24,2967.24 1990,2985 v1(1990,4010)
AD1_CHK: R3.2 R11.1 U2.73 | length 382.4
  Top Layer w10: U2.73@1434.84,3169.21 1714.21,3169.21 1724.49,3179.49 R11.1@1753,3179.49 R3.2@1753,3119.49
AD1_CTL: R14.1 U2.49 | length 1185.8
  Top Layer w10: v1(1130,2465) 1145.47,2480.47 U2.49@1145.47,2860.16 ; v1(1360,2465) 1740,2465 1755,2480 R14.1@1755,2633
  Bottom Layer w10: v1(1130,2465) v1(1360,2465)
AD2: J2.5 Q2.2 R2.2 | length 2575.4
  Top Layer w10: J2.5@1220,4583.74 1220,4090 1250,4060 v1(2030,4060) ; R2.2@2055,2909.49 2055,2964.84 Q2.2@2057.4,2967.24 v1(2102.76,2967.24)
  Bottom Layer w10: v1(2030,4060) 2030,2985 2047.76,2967.24 v1(2102.76,2967.24)
AD2_CHK: R4.2 R12.1 U2.74 | length 619.8
  Top Layer w10: U2.74@1434.84,3188.9 1648.9,3188.9 1675,3215 1945,3215 1953,3207 R12.1@1953,3179.49 R4.2@1953,3119.49
AD2_CTL: R15.1 U2.50 | length 1427.7
  Top Layer w10: v1(1150,2435) 1165.16,2450.16 U2.50@1165.16,2860.16 ; v1(1335,2435) 1940,2435 1960,2455 R15.1@1960,2633
  Bottom Layer w10: v1(1150,2435) v1(1335,2435)
AD3: J2.7 Q3.2 R5.2 | length 2635.7
  Top Layer w10: J2.7@1320,4583.74 1320,4150 1360,4110 v1(2065,4110) ; R5.2@2260,2909.49 2260,2964.84 Q3.2@2262.4,2967.24 v1(2292.76,2967.24)
  Bottom Layer w10: v1(2065,4110) 2065,3035 2085,3015 2280,3015 2292.76,3002.24 v1(2292.76,2967.24)
AD3_CHK: R6.2 R13.1 U2.75 | length 852
  Top Layer w10: U2.75@1434.84,3208.58 1623.58,3208.58 1655,3240 2150,3240 2158,3232 R13.1@2158,3179.49 R6.2@2158,3119.49
AD3_CTL: R16.1 U2.51 | length 1654.5
  Top Layer w10: v1(1165,2405) 1184.84,2424.84 U2.51@1184.84,2860.16 ; v1(1310,2405) 1990,2405 2025,2440 2025,2605 2053,2633 R16.1@2165,2633
  Bottom Layer w10: v1(1165,2405) v1(1310,2405)
ADC_MOTO_B: R21.1 R25.2 U2.76 | length 496.2
  Top Layer w10: U2.76@1434.84,3228.27 1608.27,3228.27 1650,3270 R25.2@1854,3270 1855,3271 R21.1@1855,3329.33
ADC_MOTO_R: R20.1 R26.2 U2.77 | length 368.2
  Top Layer w10: U2.77@1434.84,3247.95 1592.95,3247.95 1650,3305 R26.2@1719,3305 1720,3306 R20.1@1720,3365
CARD_BSL: J2.4 P7.1 | length 1634.4
  Top Layer w10: J2.4@1120,4683.74 1170,4633.74 1170,4065 1199.02,4035.98 P7.1@2152.91,4035.98
CARD_POW: J2.12 P7.6 | length 983.1
  Top Layer w10: J2.12@1520,4683.74 1570,4633.74 1570,4320 1607.95,4282.05 P7.6@2152.91,4282.05
CARD_RST: J2.10 P7.4 | length 1182.4
  Top Layer w10: J2.10@1420,4683.74 1470,4633.74 1470,4220 1506.38,4183.62 P7.4@2152.91,4183.62
CARD_SCLK: J2.8 P7.3 | length 1335
  Top Layer w10: J2.8@1320,4683.74 1370,4633.74 1370,4165 1400.59,4134.41 P7.3@2152.91,4134.41
CARD_SDA: J2.6 P7.2 | length 1481.8
  Top Layer w10: J2.6@1220,4683.74 1265,4638.74 1265,4125 1304.8,4085.2 P7.2@2152.91,4085.2
GND: C1.2 C2.1 C3.2 C5.2 C6.1 C7.1 C8.2 C10.1 C12.2 C13.2 C15.2 C16.2 C18.2 C19.2 C21.2 C22.2 C23.2 C24.2 C25.2 C26.2 C27.2 D4.1 D5.1 D6.1 D7.1 J1.4 J2.2 J3.1 J3.3 JP1.2 JP2.2 P2.2 P2.4 P2.6 P2.8 P3.3 P4.1 P5.1 P6.1 P7.5 Q4.2 Q5.2 Q6.2 Q7.3 Q8.2 Q9.2 Q11.2 Q13.2 Q14.2 Q15.2 R11.2 R12.2 R13.2 R25.1 R26.1 R29.1 R56.1 R71.1 R76.1 R77.1 R82.1 R84.1 R85.1 R89.1 U1.1 U1.2 U1.6 U2.63 U2.65 U3.1 U3.2 U3.6 U4.6 U4.9 U5.6 U5.9 U6.6 U6.9 U7.6 U7.9 U8.1 | length 633
  Top Layer w10: v1(1325,2790) v1(1325,2705) 1336.6,2693.4 C6.1@1362.01,2693.4 v1(1473.4,2693.4) v1(1597,2817) C5.2@1597,2932.99 1597,2953 v1(1580,2970) v1(1520,2970)
  other v1: 1640,125 1500,135 1280,150 695,165 1140,195 1395,225 1510,265 1620,265 1760,305 1300,330 680,420 430,445 475,445 530,445 2145,450 1025,465 1080,465 1135,465 1595,470 1640,470 1695,470 110,475 2235,480 2285,480 225,515 1395,515 1970,515 815,520 2160,520 140,705 1320,705 1780,710 630,795 340,1205 835,1235 975,1235 1130,1235 1370,1235 1500,1235 1650,1235 1810,1235 1990,1235 2140,1235 340,1315 430,1740 490,1740 550,1740 1056.11,1740 1116.11,1740 1562.22,1740 1622.22,1740 1682.22,1740 2128.33,1740 2188.33,1740 2248.33,1740 1855,1745 1320,1755 430,1790 490,1790 550,1790 1056.11,1790 1116.11,1790 1350,1790 1562.22,1790 1622.22,1790 1682.22,1790 2128.33,1790 2188.33,1790 2248.33,1790 975,1900 2295,1900 975,1950 2295,1950 905,2000 2085,2000 1200,2020 1200,2085 725,2100 1885,2105 270,2170 1245,2185 1435,2185 170,2220 1970,2250 2145,2270 2050,2410 170,2445 590,2445 1500,2540 410,2600 1885,2655 2300,2655 170,2670 1425,2693.4 1510,2730 415,2750 2115,2750 1555,2775 1400,2800 415,2830 1430,2830 1460,2860 1597,2865 655,2870 1490,2890 415,2910 1305,2955 1190,2970 415,2985 1640,3030 415,3065 1200,3070 1325,3070 1640,3080 415,3145 1855,3180 2095,3180 2265,3180 415,3225 1965,3295 415,3305 1820,3305 415,3380 1395,3440 415,3460 415,3540 1095,3570 415,3620 1095,3650 1275,3655 2150,3685 415,3695 1095,3760 415,3775 1095,3885 200,3895 480,3970 145,4050 1015,4055 515,4180 45,4215 2080,4230 230,4325 1620,4340 365,4360 755,4420 2210,4510 755,4595 2210,4690 755,4710
  other v2: 203,697.89 253,697.89 303,697.89 794.67,697.89 844.67,697.89 894.67,697.89 1373,697.89 1423,697.89 1473,697.89 1946.33,697.89 1996.33,697.89 2046.33,697.89
gongwei1: P2.1 U2.29 | length 2082.8
  Top Layer w10: P2.1@235,4655 235,4575 255,4555 525,4555 540,4540 540,3955 580,3915 700,3915 745,3870 745,3205 800.47,3149.53 U2.29@915.16,3149.53
gongwei2: P2.3 U2.28 | length 1971.8
  Top Layer w10: P2.3@335,4655 335,4590 350,4575 550,4575 565,4560 565,3965 595,3935 710,3935 765,3880 765,3215 810.79,3169.21 U2.28@915.16,3169.21
gongwei3: P2.5 U2.27 | length 1851.9
  Top Layer w10: P2.5@435,4655 435,4610 450,4595 565,4595 587,4573 587,3978 610,3955 720,3955 785,3890 785,3225 821.1,3188.9 U2.27@915.16,3188.9
gongwei4: P2.7 U2.26 | length 1743.7
  Top Layer w10: P2.7@535,4655 585,4655 610,4630 610,3990 625,3975 730,3975 805,3900 805,3235 831.42,3208.58 U2.26@915.16,3208.58